# EAGLE board ledy (EAGLE 7.2.0)
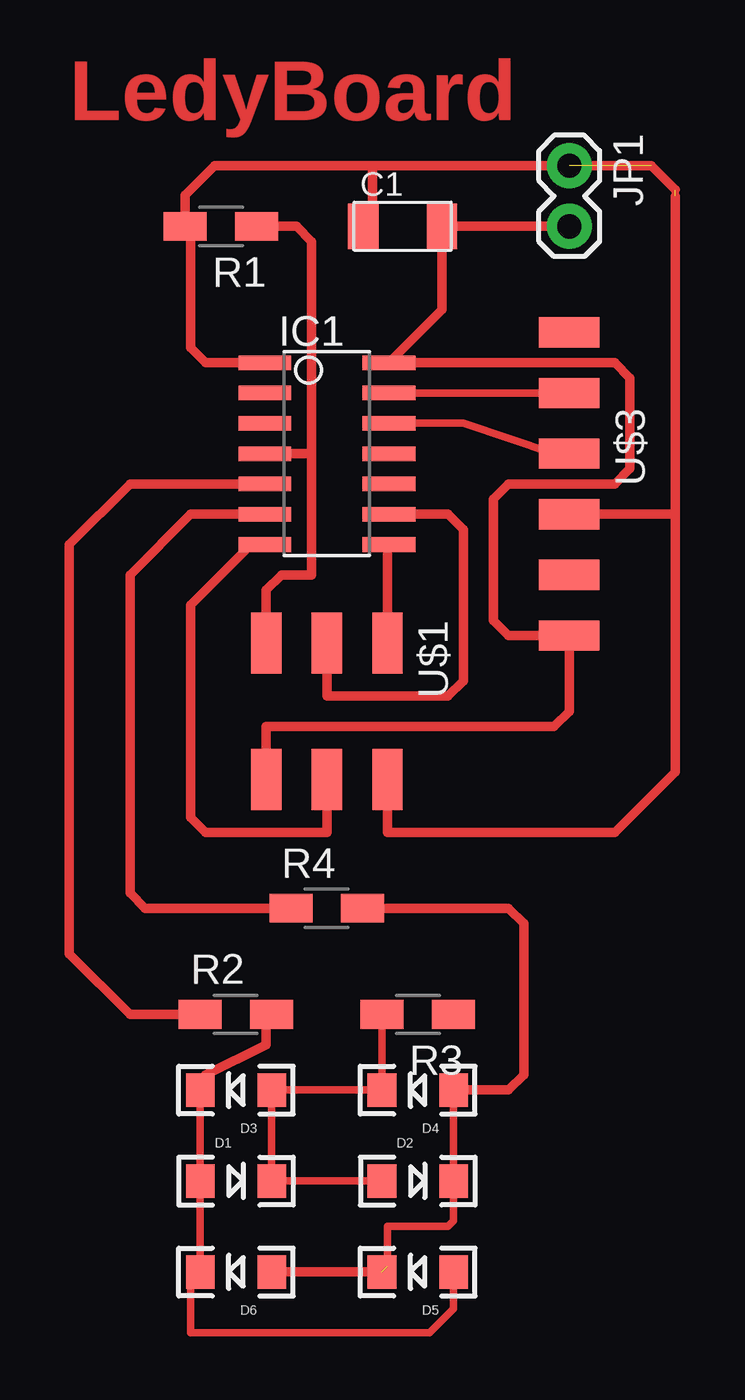
[diagram p0: board, top side]

No outline drawn. Coordinates in mm, seen from the top.
Copper layers (1*16): Top 0.035mm / dielectric 1.5mm / Bottom 0.035mm
Design rules "default": minimum track width 10mil, minimum drill 24mil, track to track 8mil, track to pad 8mil, pad to pad 8mil, via to via 8mil, smd to smd 8mil, copper to edge 40mil, drill to drill 8mil, minimum pad ring 10mil, minimum via ring 8mil, stop-mask expansion 4mil, vias tented up to drill 0mil, thermal gap 10mil

## Footprints (pad centres in the part's own frame; a part is rotated, then mirrored left to right if it is on the bottom)
C1206FAB = smd 1.27 x 1.905: 1 -1.651,0; 2 1.651,0
LED-1206 = smd 1.2 x 1.4: A -1.5,0; C 1.5,0
SOIC14 = smd 0.61 x 2.21: 1 -3.81,-2.603; 2 -2.54,-2.603; 3 -1.27,-2.603; 4 0,-2.603; 5 1.27,-2.603; 6 2.54,-2.603; 7 3.81,-2.603; 8 3.81,2.603; 9 2.54,2.603; 10 1.27,2.603; 11 0,2.603; 12 -1.27,2.603; 13 -2.54,2.603; 14 -3.81,2.603
1X02 = drill 1.016 pad 1.88: 1 0,0; 2 2.54,0
R1206W = smd 1.8 x 1.2: 1 -1.499,0; 2 1.499,0
2X03SMD = smd 2.54 x 1.27: 1 -2.857,2.54; 2 2.857,2.54; 3 -2.857,0; 4 2.857,0; 5 -2.857,-2.54; 6 2.857,-2.54
1X06SMD = smd 2.54 x 1.27: 1 0,6.35; 2 0,3.81; 3 0,1.27; 4 0,-1.27; 5 0,-3.81; 6 0,-6.35

## Placement (x,y rotation side)
C1  CAP-US1206FAB  [C1206FAB]  80.01,74.93 0 top
D1  red  [LED-1206]  73.03,34.92 0 top
D2  red  [LED-1206]  80.64,34.92 0 top
D3  red  [LED-1206]  73.03,38.73 180 top
D4  red  [LED-1206]  80.64,38.73 180 top
D5  red  [LED-1206]  80.64,31.11 180 top
D6  red  [LED-1206]  73.03,31.11 180 top
IC1  ATTINY44-SSU  [SOIC14]  76.83,65.41 270 top
JP1  [1X02]  87,77.47 270 top
R1  10K  [R1206W]  72.39,74.93 180 top
R2  499  [R1206W]  73.03,41.91 0 top
R3  499  [R1206W]  80.64,41.91 180 top
R4  499  [R1206W]  76.83,46.35 0 top
U$1  AVRISPSMD  [2X03SMD]  76.83,54.61 270 top
U$3  FTDI-SMD-HEADER  [1X06SMD]  87,64.14 180 top

## Library data of the parts
C1 IC1 R1-R4 U$1 U$3 = fab
D1-D6 = SparkFun-LED
JP1 = SparkFun-Connectors

## Nets
GND: C1.2 IC1.14 JP1.2 U$1.6 U$3.1
LED1: IC1.5 R2.1
LED2: R3.1
LED3: IC1.6 R4.1
MISO: IC1.8 U$1.1
MOSI: IC1.7 U$1.4
N$3: D1.A D3.C D5.A D6.C R2.2
N$5: D2.C D4.A D5.C D6.A R4.2
N$9: D1.C D2.A D3.A D4.C R3.2
RST: IC1.4 R1.1 U$1.5
RX: IC1.12 U$3.4
SCK: IC1.9 U$1.3
TX: IC1.13 U$3.5
VCC: C1.1 IC1.1 JP1.1 R1.2 U$1.2 U$3.3

## Tracks (layer width: path | path; a pad name or v marks a point on that pad's centre or on a via)
GND
  Top 0.406: U$1.6 74.3,53.98 86.36,53.98 87,54.61 U$3.1 84.45,57.78 83.82,58.42 83.82,63.5 84.45,64.14 88.9,64.14 89.53,64.77 89.53,68.58 88.9,69.22 IC1.14 81.66,71.44 C1.2 JP1.2
LED1
  Top 0.406: R2.1 68.58,41.91 66.04,44.45 66.04,61.59 68.58,64.14 IC1.5
LED3
  Top 0.406: IC1.6 71.12,62.87 68.58,60.33 68.58,46.99 69.22,46.35 R4.1
MISO
  Top 0.406: IC1.8 79.38,61.59 U$1.1
MOSI
  Top 0.406: IC1.7 73.66,61.59 71.12,59.05 71.12,50.16 71.75,49.53 76.83,49.53 U$1.4
N$3
  Top 0.305: D3.C D1.A D6.C 71.12,30.71 71.12,28.57 81.14,28.57 82.14,29.57 D5.A
  Top 0.406: R2.2 74.3,41.91 74.3,40.64 71.75,39.37 71.75,38.73 D3.C
N$5  (1 unrouted)
  Top 0.305: D4.A D2.C 82.14,33.25 81.92,33.02 79.38,33.02 79.38,31.34
  Top 0.406: D6.A D5.C | R4.2 84.45,46.35 85.09,45.72 85.09,39.37 84.45,38.73 D4.A
N$9
  Top 0.305: D2.A D1.C D3.A D4.C R3.2
RST
  Top 0.406: R1.1 75.56,74.93 76.2,74.3 76.2,65.41 | 76.2,65.41 76.2,60.33 74.93,60.33 74.3,59.69 U$1.5 | IC1.4 76.2,65.41
RX
  Top 0.305: IC1.12 82.55,66.67 86.36,65.41 U$3.4
SCK
  Top 0.406: U$1.3 76.83,55.24 81.92,55.24 82.55,55.88 82.55,62.23 81.92,62.87 IC1.9
TX
  Top 0.305: IC1.13 U$3.5
VCC  (2 unrouted)
  Top 0.305: C1.1 78.11,75.18 | 71.12,75.16 R1.2 71.12,74.7
  Top 0.406: U$1.2 79.38,49.53 88.9,49.53 91.44,52.07 91.44,62.87 | U$3.3 91.44,62.87 | 91.44,62.87 91.44,76.2 | 91.44,76.47 90.44,77.47 78.74,77.47 | 78.74,77.47 72.12,77.47 70.89,76.24 R1.2 | 78.11,75.18 78.74,75.82 78.74,77.47 | 71.12,74.7 71.12,69.85 71.75,69.22 IC1.1

## Text on the board
Top: LedyBoard